# Altium PCB ScreenBoard.PcbDoc
Units mil, origin at the board's own origin, x right, y up, seen from the top; angles counter-clockwise.
Board outline 3470 x 2820 mil, 2 copper layers (Top Layer, Bottom Layer); 7 components, 24 nets, 144 pads, 2611 vias.
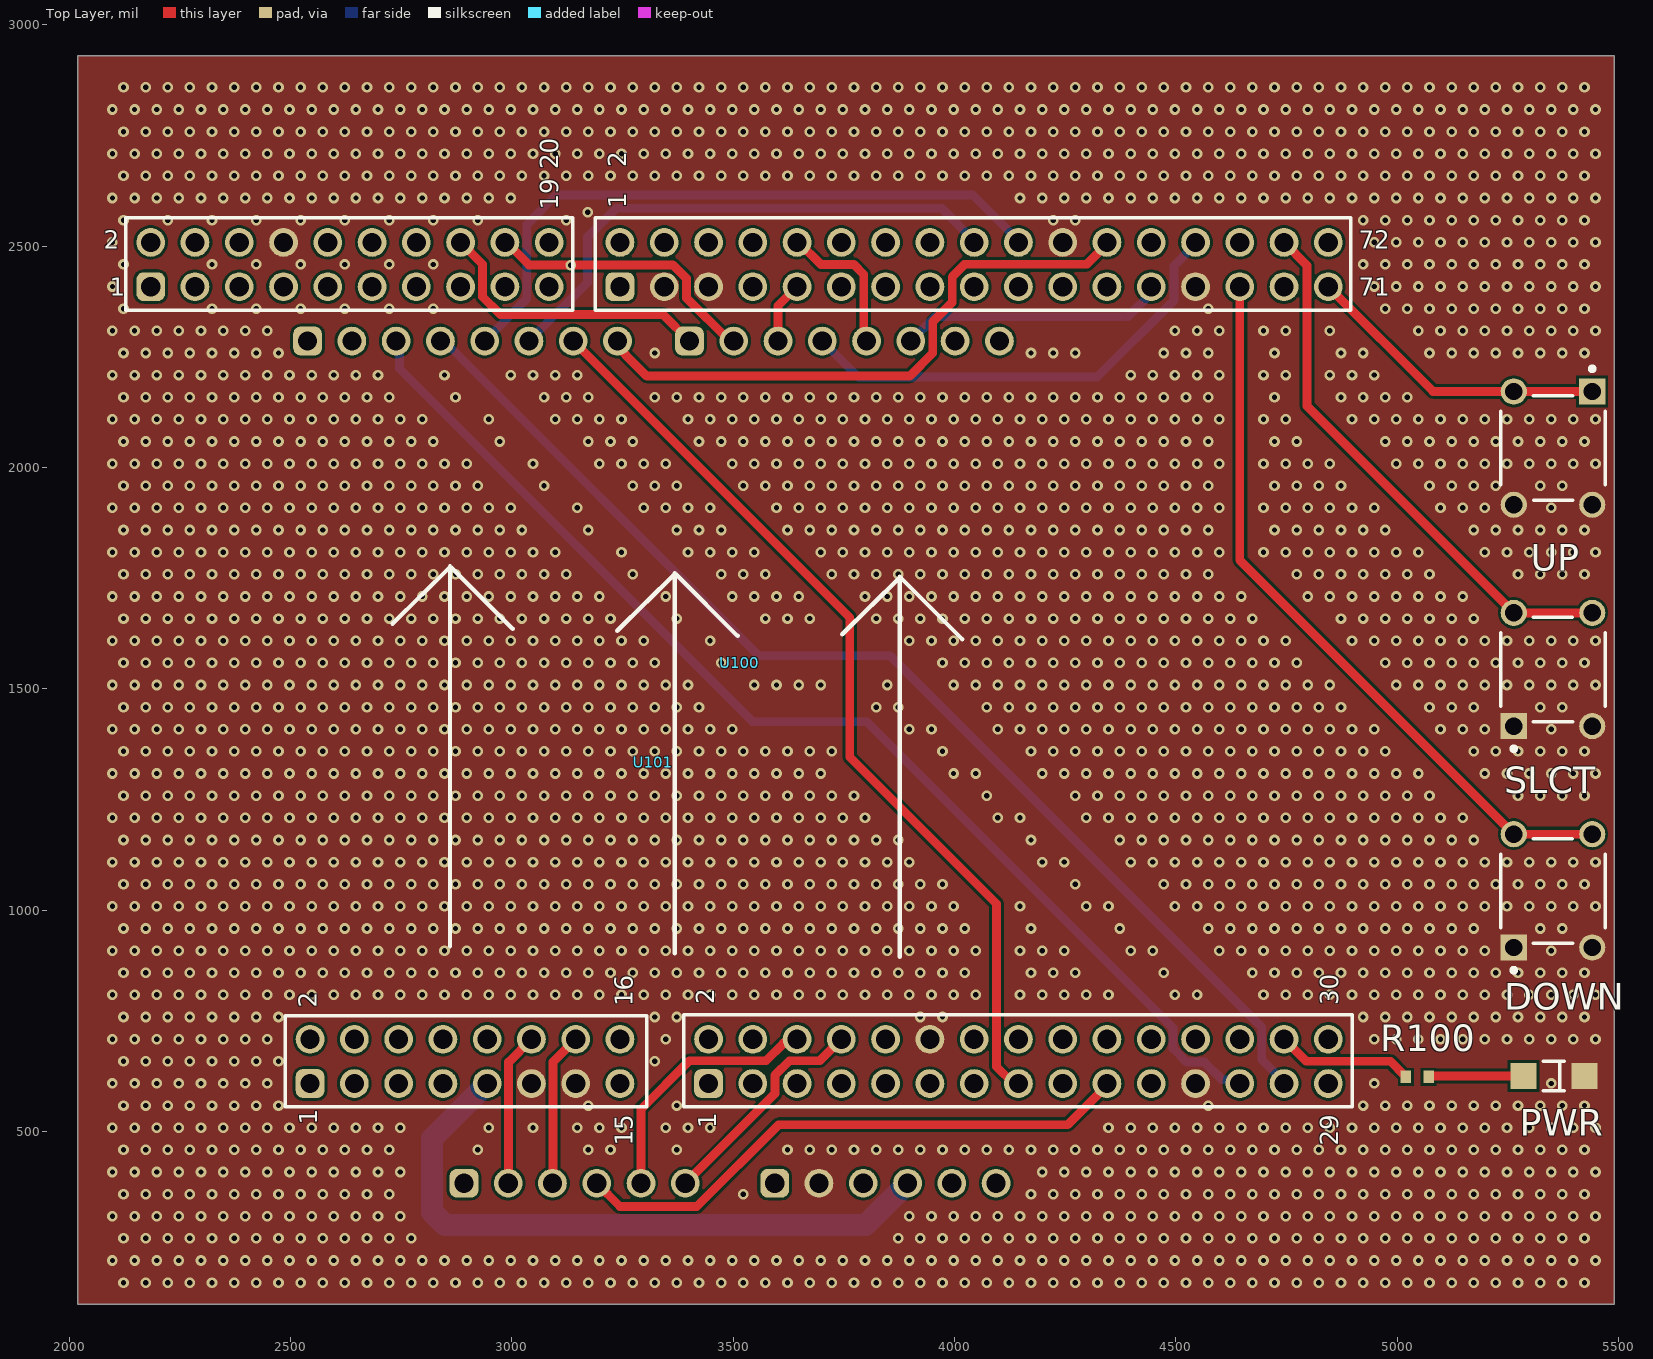
[diagram p0: Top Layer view]
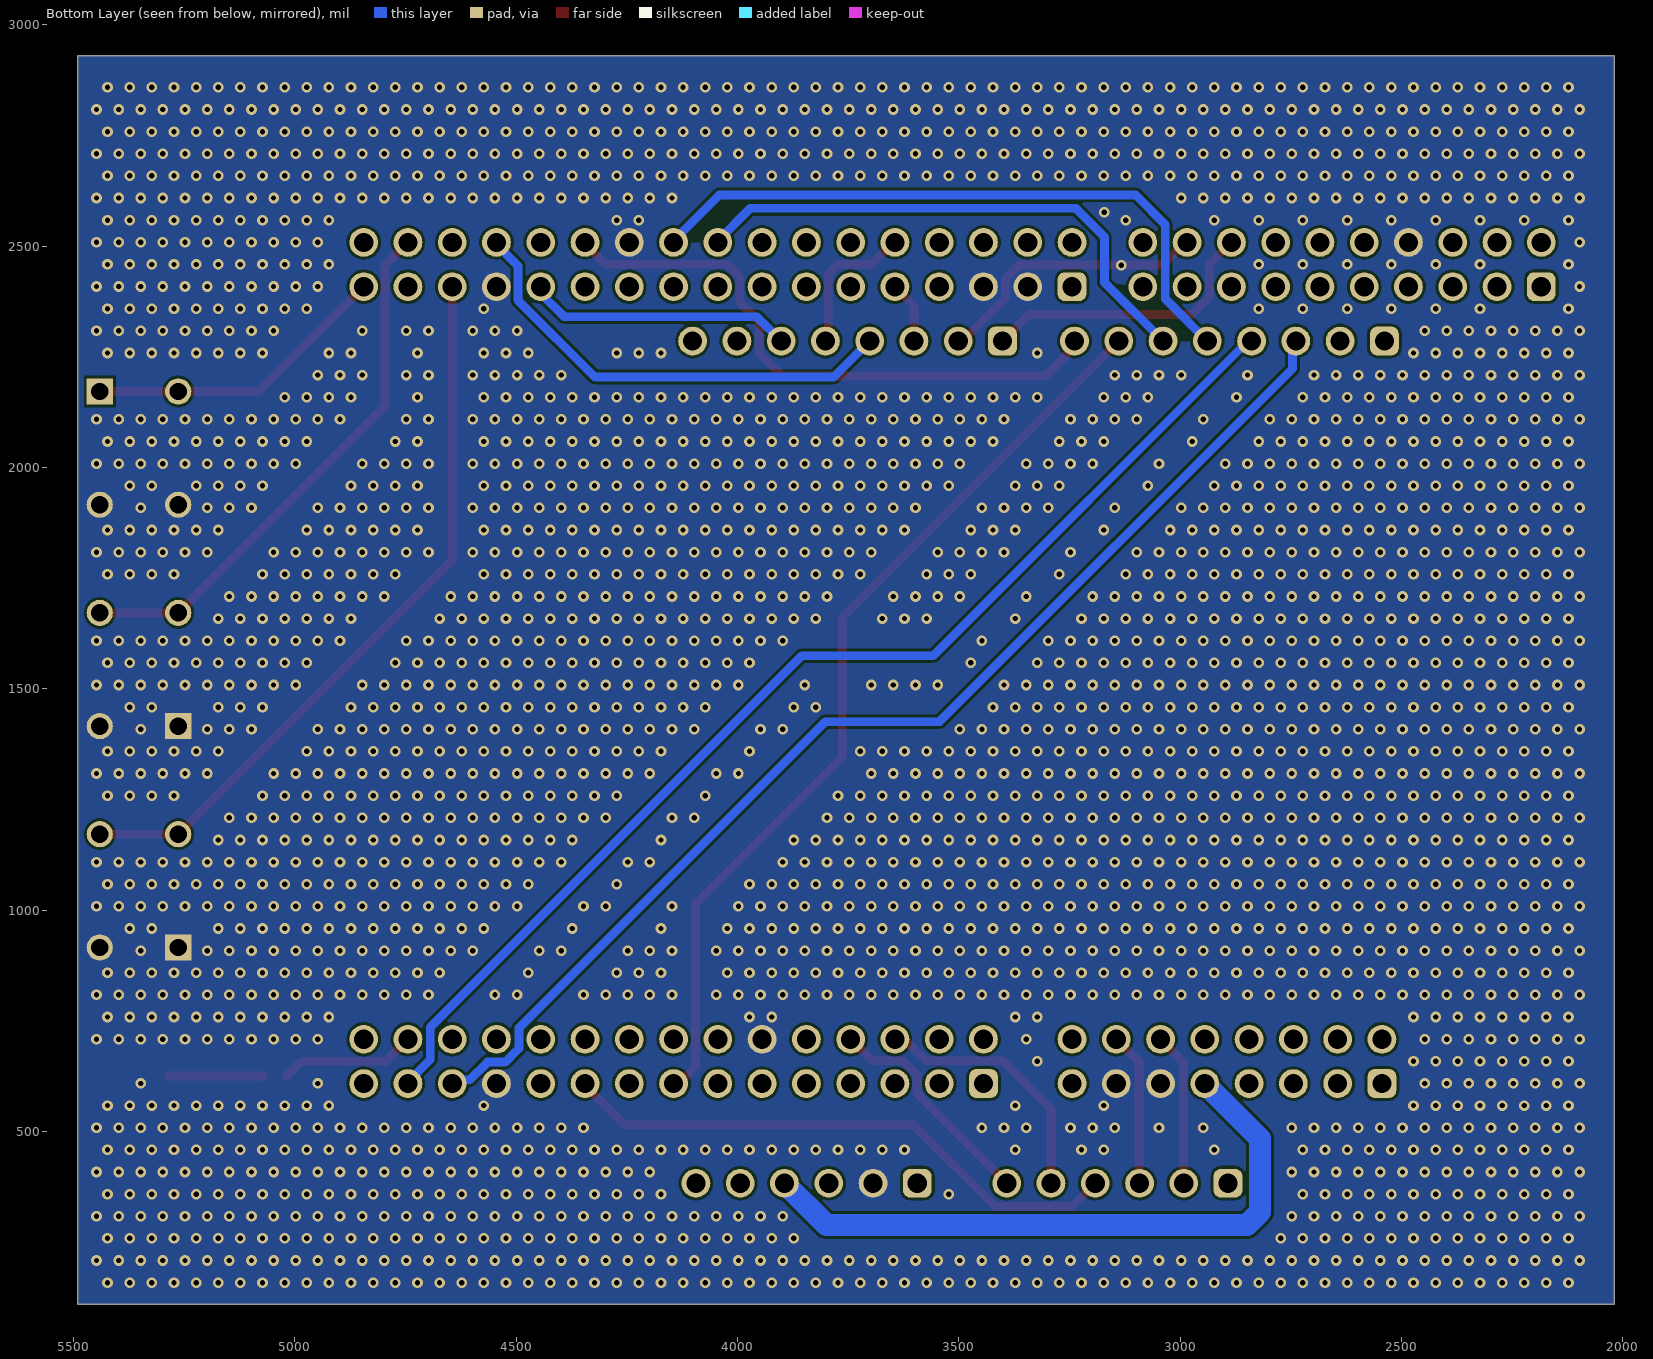
[diagram p1: Bottom Layer view, seen from below]

## Layer stack, top to bottom
Top Solder: solder mask 0.4, Solder Resist, Dk 3.5
Top Layer: signal copper 1.4
Dielectric 1: dielectric 12.6, FR-4, Dk 4.8
Bottom Layer: signal copper 1.4
Bottom Solder: solder mask 0.4, Solder Resist, Dk 3.5

## Board outline
2020,110 5490,110 5490,2930 2020,2930

## Design rules (kind name [scope] priority, off if disabled: settings)
Clearance [All] p1: gap=6 ignorepadtopadclearanceinfootprint=FALSE
HoleSize [All] p1: absolutevalues=TRUE maxlimit=100 minlimit=11.81 maxpercent=80.000 minpercent=20.000
MinimumAnnularRing [All] p1: minimumring=6
MinimumSolderMaskSliver [All] p1: minsoldermaskwidth=6
PolygonConnect [All] p1: connectstyle=Direct reliefconductorwidth=10 reliefentries=4 polygonreliefangle="90 Angle" airgapwidth=10
RoutingVias [All] p1: holewidth=11.81 width=50 viastyle="Through Hole" minholewidth=11.81 minwidth=10 maxholewidth=28 maxwidth=50
SolderMaskExpansion [All] p1: expansion=4 istentingtop=FALSE
Width [All] p1: maxlimit=50 minlimit=6 preferedwidth=10 minimp=50.000000 maximp=50.000000 favimp=50.000000
28 further rules are at their usual default settings.

## Components (designator, comment, footprint, x,y, rotation, side; value= is the part's Value field where it differs from the comment)
DOWN "1825910-6" TECO-1825910-6_V 5352,1044 r90 top locked (schematic designator SW102)
PWR "HSMG-C150" FP-HSMG-C150-MFG 5354,626 r180 top (schematic designator D100)
R100 "0402" 0402_FOOTPRINT 5071,624 r180 top
SLCT "1825910-6" TECO-1825910-6_V 5352,2044 r270 top locked (schematic designator SW100)
U100 "NUCLEO-H755ZL_Zio" H7/H5_NUCLEO_ZIO 1344.48,350.47 r90 top locked
U101 "3'5_LCD_ARDUINO" 3'5_LCD_ARDUINO 2892,383.61 r90 top
UP "1825910-6" TECO-1825910-6_V 5352,1544 r90 top locked (schematic designator SW101)

## Footprints (in the part's own frame and the unit in brackets; to place one, negate y for a bottom-side part, rotate by r counter-clockwise, add the part's x,y. Pads: shape width x height; smd on the part's side, far side on the other; paste and mask are expansions set on the pad)
3'5_LCD_ARDUINO [mm]
  rrect50% 1.65x1.65 hole 1.1: 1(0,0) 7(0,-17.83) 13(48.32,8.97) 21(48.32,-12.94)
  round 1.65 hole 1.1: 2(0,-2.54) 3(0,-5.08) 4(0,-7.62) 5(0,-10.16) 6(0,-12.7) 8(0,-20.37) 9(0,-22.91) 10(0,-25.45) 11(0,-27.99) 12(0,-30.53) 14(48.32,6.43) 15(48.32,3.89) 16(48.32,1.35) 17(48.32,-1.19) 18(48.32,-3.73) 19(48.32,-6.27) 20(48.32,-8.81) 22(48.32,-15.48) 23(48.32,-18.02) 24(48.32,-20.56) 25(48.32,-23.1) 26(48.32,-25.64) 27(48.32,-28.18) 28(48.32,-30.72)
  silkscreen extent 13,-28.6 35.4,4.1
0402_FOOTPRINT [mm]
  rect 0.6x0.7 smd: 1(0,0) 2(1.3,0)
FP-HSMG-C150-MFG [mm]
  rect 1.5x1.5 smd paste+0 mask+0: 1(-1.75,0) 2(1.75,0)
  silkscreen extent -0.6,-0.85 0.6,0.85, body extent -2.6,-0.95 2.6,0.95, height 0.25
H7/H5_NUCLEO_ZIO [mm]
  rrect50% 1.65x1.65 hole 1.1: 1(6.56,-30.48) 17(6.56,-53.34) 47(52.28,-21.336) 67(52.28,-48.26)
  round 1.65 hole 1.1: 2(9.1,-30.48) 3(6.56,-33.02) 4(9.1,-33.02) 5(6.56,-35.56) 6(9.1,-35.56) 7(6.56,-38.1) 8(9.1,-38.1) 9(6.56,-40.64) 10(9.1,-40.64) 11(6.56,-43.18) 12(9.1,-43.18) 13(6.56,-45.72) 14(9.1,-45.72) 15(6.56,-48.26) 16(9.1,-48.26) 18(9.1,-53.34) 19(6.56,-55.88) 20(9.1,-55.88) 21(6.56,-58.42) 22(9.1,-58.42) 23(6.56,-60.96) 24(9.1,-60.96) 25(6.56,-63.5) 26(9.1,-63.5) 27(6.56,-66.04) 28(9.1,-66.04) 29(6.56,-68.58) 30(9.1,-68.58) 31(6.56,-71.12) 32(9.1,-71.12) 33(6.56,-73.66) 34(9.1,-73.66) 35(6.56,-76.2) 36(9.1,-76.2) 37(6.56,-78.74) 38(9.1,-78.74) 39(6.56,-81.28) 40(9.1,-81.28) 41(6.56,-83.82) 42(9.1,-83.82) 43(6.56,-86.36) 44(9.1,-86.36) 45(6.56,-88.9) 46(9.1,-88.9) 48(54.82,-21.336) 49(52.28,-23.876) 50(54.82,-23.876) 51(52.28,-26.416) 52(54.82,-26.416) 53(52.28,-28.956) 54(54.82,-28.956) 55(52.28,-31.496) 56(54.82,-31.496) 57(52.28,-34.036) 58(54.82,-34.036) 59(52.28,-36.576) 60(54.82,-36.576) 61(52.28,-39.116) 62(54.82,-39.116) 63(52.28,-41.656) 64(54.82,-41.656) 65(52.28,-44.196) 66(54.82,-44.196) 68(54.82,-48.26) 69(52.28,-50.8) 70(54.82,-50.8) 71(52.28,-53.34) 72(54.82,-53.34) 73(52.28,-55.88) 74(54.82,-55.88) 75(52.28,-58.42) 76(54.82,-58.42) 77(52.28,-60.96) 78(54.82,-60.96) 79(52.28,-63.5) 80(54.82,-63.5) 81(52.28,-66.04) 82(54.82,-66.04) 83(52.28,-68.58) 84(54.82,-68.58) 85(52.28,-71.12) 86(54.82,-71.12) 87(52.28,-73.66) 88(54.82,-73.66) 89(52.28,-76.2) 90(54.82,-76.2) 91(52.28,-78.74) 92(54.82,-78.74) 93(52.28,-81.28) 94(54.82,-81.28) 95(52.28,-83.82) 96(54.82,-83.82) 97(52.28,-86.36) 98(54.82,-86.36) 99(52.28,-88.9) 100(54.82,-88.9)
  silkscreen extent 5.21,-90.26 56.22,-19.92
TECO-1825910-6_V [mm] "Switch, 4-Leads, Body 5.99x5.99mm"
  rect 1.5x1.5 hole 0.99: 1(-3.25,2.25)
  round 1.5 hole 0.99: 2(3.25,2.25) 3(-3.25,-2.25) 4(3.25,-2.25)
  silkscreen extent -4.67,-2.99 2.99,3, body extent -3,-2.99 2.99,3, height 5

## Part data
DOWN SLCT UP: library part CMP-1684-00021-1, "Tact Switch, SPST-NO, 0.05 A, -35 to 85 degC, 4-Pin THD, RoHS, Bulk", Actuator Color=Black, Contact Rating @ Voltage=0.05A@24VDC, Dielectric Strength=500VAC, Manufacturer="TE Connectivity", Maximum AC Voltage Rating=N/A, Maximum Contact Resistance=100mOhm, Maximum DC Voltage Rating=24V, Minimum Insulation Resistance=100MOhm, Operating Temperature=-35to85C, Package Description="4-Pin Through Hole Device, Body 5.99 x 5.99 mm, Pitch 6.5 mm", Package Reference=THD, Actuator Length=1.4mm, Actuator Material=PolybutyleneTerephthalate, Actuator Style=RoundButton, Base Material=N/A, Body Orientation=Straight, Bushing Type=Unthreaded, Contact Material=CopperAlloy, Contact Plating=Silver, Datasheet URL=http://www.te.com/commerce/DocumentDelivery/DDEController?Action=showdoc&DocId=Customer+Drawing%7F1825910%7FC9%7Fpdf%7FEnglish%7FENG_CD_1825910_C9.pdf%7F1825910-6, Datasheet Version="Rev. C9", Dimension=5.99x5mm, Electrical Life=100000Cycles, Family=1825910, Function=MomentaryContact, Housing Material=N/A, Illumination=N/R, Manufacturer URL=http://www.te.com, Mechanical Life=100000Cycles, Mounting=ThroughHole, Packaging=N/A, Part No=1825910-6, Pole Throw Configuration=SPST, Product Weight=N/A, RoHS=Yes, Seal Description=N/A, Seal Location=N/A, Switch Configuration=OFF(ON), Terminal Type=PCPins, Thread Size=N/R
PWR: library part CMP-2000-05061-2, "LED GREEN DIFFUSED 1206 SMD", Colour=Green, Forward Current=20mA, Forward Voltage=2.2V, Manufacturer=Broadcom, Max Junction Temp=+95°C, Power Dissipation=65mW, Reverse Voltage=5V, Temperature="-40°C to +85°C", Temperature Range High=+85°C, Temperature Range Low=-40°C, Automotive=No, Category=Diode, ComponentLink2Description=Datasheet, ComponentLink2URL=https://docs.broadcom.com/docs/AV02-0551EN, Device Class L1=Optoelectronics, Device Class L2=LEDs, Device Class L3=unset, Digikey Description="LED GREEN DIFFUSED 1206 SMD", Height=1.2mm, Ipc Land Pattern Name=DIOCP320160X55, Lead Free=Yes, Led Orientation="Top View", Luminous Intensity=15mcd, Manufacturer Part Number=HSMG-C150, Mouser Description="LED Uni-Color Green 570nm 2-Pin Chip LED T/R", Octopart=https://octopart.com/hsmg-c150-broadcom-71131304, Package=HSMG-C150, Peak Emmision Wavelength=570nm, RoHS=TRUE, Viewing Angle=170°, Wavelength=572nm
R100: library part Resistor_0402, "0402 resistor"

## Via types
v1: diameter 24, hole 12, Top Layer to Bottom Layer, 2611 vias

## Nets (pads, with @x,y where several pads share a name; then routed paths per layer and width w, separated by ;. In a path a pad name is that pad's centre, name@x,y a point inside that pad or via, vN(x,y) a via of type N, cw(c..) or ccw(c..) an arc to the next point about the centre after c; other vN are vias at no path point)
5V: U100.9 U101.10 | length 1467.3
  Bottom Layer w50: U100.9 2820,484.26 2820,318.29 2849.29,289 3799.36,289 U101.10
BTN_1: SLCT.1 SLCT.3 U100.99 | length 694.2
  Top Layer w20: U100.99 5081.27,2171.95 SLCT.3 SLCT.1
BTN_2: U100.98 UP.2 UP.4 | length 1228.9
  Top Layer w20: U100.98 4796,2457.22 4796,2139.37 UP.2 UP.4
BTN_3: DOWN.2 DOWN.4 U100.95 | length 1670.3
  Top Layer w20: U100.95 4644.48,1790.89 DOWN.2 DOWN.4
CS: U100.14 U101.3 | length 346.9
  Top Layer w20: U101.3 3092.96,384.57 3092.96,657.22 U100.14
D0: U100.62 U101.21 | length 652.1
  Top Layer w20: U100.62 2934,2459.22 2934,2386 2974,2346 3341.42,2346 U101.21
D1: U100.64 U101.22 | length 630.8
  Top Layer w20: U100.64@2988.48,2508.51 3038.99,2458 3363.78,2458 3394.48,2427.3 3394.48,2383.52 3492.03,2285.97 U101.22
D2: U100.41 U101.15 | length 2659.4
  Bottom Layer w20: U101.15 2746.12,2278.7 2746.12,2223.88 3544,1426 3802,1426 4494,734 4494,688 4524.78,657.22 4564.56,657.22 4604.58,617.2 4636.02,617.2 U100.41
D3: U100.43 U101.16 | length 2647.2
  Bottom Layer w20: U101.16 2847.03,2285.97 3558,1575 3855,1575 4694,736 4694,662.99 U100.43@4748.48,608.51
D4: U100.86 U101.17 | length 1489
  Bottom Layer w20: U101.17 3034,2381.12 3034,2549 3100.74,2615.74 4041.25,2615.74 U100.86@4148.48,2508.51
D5: U100.84 U101.18 | length 1226.1
  Bottom Layer w20: U101.18 3170.74,2417.86 3170.74,2520.74 3235.74,2585.74 3971.25,2585.74 U100.84@4048.48,2508.51
D6: U100.31 U101.19 | length 2100.4
  Top Layer w20: U101.19 3763.48,1661.34 3763.48,1346.32 4095,1014.8 4095,647 4133.26,608.74 U100.31
D7: U100.90 U101.20 | length 1350.1
  Top Layer w20: U101.20 3238.85,2273.81 3256.62,2256.04 3256.62,2255.38 3305.26,2206.74 3898.74,2206.74 3951,2259 3951,2329.26 3995,2373.26 3995,2431.26 4023.01,2459.27 4299.24,2459.27 U100.90@4348.48,2508.51
GND: DOWN.1 DOWN.3 PWR.1 SLCT.2 SLCT.4 U100.11 U100.13 U100.28 U100.39 U100.54 U100.69 U100.71 U100.88 U100.93 U101.8 UP.1 UP.3
  other v1: 2123,159 2173,159 2223,159 2273,159 2323,159 2373,159 2423,159 2473,159 2523,159 2573,159 2623,159 2673,159 2723,159 2773,159 2823,159 2873,159 2923,159 2973,159 3023,159 3073,159 3123,159 3173,159 3223,159 3273,159 3323,159 3373,159 3423,159 3473,159 3523,159 3573,159 3623,159 3673,159 3723,159 3773,159 3823,159 3873,159 3923,159 3973,159 4023,159 4073,159 4123,159 4173,159 4223,159 4273,159 4323,159 4373,159 4423,159 4473,159 4523,159 4573,159 4623,159 4673,159 4723,159 4773,159 4823,159 4873,159 4923,159 4973,159 5023,159 5073,159 5123,159 5173,159 5223,159 5273,159 5323,159 5373,159 5423,159 2098,209 2148,209 2198,209 2248,209 2298,209 2348,209 2398,209 2448,209 2498,209 2548,209 2598,209 2648,209 2698,209 2748,209 2798,209 2848,209 2898,209 2948,209 2998,209 3048,209 3098,209 3148,209 3198,209 3248,209 3298,209 3348,209 3398,209 3448,209 3498,209 3548,209 3598,209 3648,209 3698,209 3748,209 3798,209 3848,209 3898,209 3948,209 3998,209 4048,209 4098,209 4148,209 4198,209 4248,209 4298,209 4348,209 4398,209 4448,209 4498,209 4548,209 4598,209 4648,209 4698,209 4748,209 4798,209 4848,209 4898,209 4948,209 4998,209 5048,209 5098,209 5148,209 5198,209 5248,209 5298,209 5348,209 5398,209 5448,209 2123,259 2173,259 2223,259 2273,259 2323,259 2373,259 2423,259 2473,259 2523,259 2573,259 2623,259 2673,259 2723,259 2773,259 3873,259 3923,259 3973,259 4023,259 4073,259 4123,259 4173,259 4223,259 4273,259 4323,259 4373,259 4423,259 4473,259 4523,259 4573,259 4623,259 4673,259 4723,259 4773,259 4823,259 4873,259 4923,259 4973,259 5023,259 5073,259 5123,259 5173,259 5223,259 5273,259 5323,259 5373,259 5423,259 2098,309 2148,309 2198,309 2248,309 2298,309 2348,309 2398,309 2448,309 2498,309 2548,309 2598,309 2648,309 2698,309 2748,309 3898,309 3948,309 3998,309 4048,309 4098,309 4148,309 4198,309 4248,309 4298,309 4348,309 4398,309 4448,309 4498,309 4548,309 4598,309 4648,309 4698,309 4748,309 4798,309 4848,309 4898,309 4948,309 4998,309 5048,309 5098,309 5148,309 5198,309 5248,309 5298,309 5348,309 5398,309 5448,309 2123,359 2173,359 2223,359 2273,359 2323,359 2373,359 2423,359 2473,359 2523,359 2573,359 2623,359 2673,359 2723,359 3523,359 4173,359 4223,359 4273,359 4323,359 4373,359 4423,359 4473,359 4523,359 4573,359 4623,359 4673,359 4723,359 4773,359 4823,359 4873,359 4923,359 4973,359 5023,359 5073,359 5123,359 5173,359 5223,359 5273,359 5323,359 5373,359 5423,359 2098,409 2148,409 2198,409 2248,409 2298,409 2348,409 2398,409 2448,409 2498,409 2548,409 2598,409 2648,409 2698,409 2748,409 4198,409 4248,409 4298,409 4348,409 4398,409 4448,409 4498,409 4548,409 4598,409 4648,409 4698,409 4748,409 4798,409 4848,409 4898,409 4948,409 4998,409 5048,409 5098,409 5148,409 5198,409 5248,409 5298,409 5348,409 5398,409 5448,409 2123,459 2173,459 2223,459 2273,459 2323,459 2373,459 2423,459 2473,459 2523,459 2573,459 2623,459 2673,459 2723,459 2923,459 3173,459 3223,459 3373,459 3623,459 3673,459 3723,459 3773,459 3823,459 3873,459 3923,459 3973,459 4023,459 4073,459 4123,459 4173,459 4223,459 4273,459 4323,459 4373,459 4423,459 4473,459 4523,459 4573,459 4623,459 4673,459 4723,459 4773,459 4823,459 4873,459 4923,459 4973,459 5023,459 5073,459 5123,459 5173,459 5223,459 5273,459 5323,459 5373,459 5423,459 2098,509 2148,509 2198,509 2248,509 2298,509 2348,509 2398,509 2448,509 2498,509 2548,509 2598,509 2648,509 2698,509 2748,509 2948,509 3048,509 3148,509 3198,509 3248,509 3348,509 3398,509 3448,509 4348,509 4398,509 4448,509 4498,509 4548,509 4598,509 4648,509 4698,509 4748,509 4798,509 4848,509 4898,509 4948,509 4998,509 5048,509 5098,509 5148,509 5198,509 5248,509 5298,509 5348,509 5398,509 5448,509 2123,559 2173,559 2223,559 2273,559 2323,559 2373,559 2423,559 2473,559 3173,559 3373,559 4573,559 4923,559 4973,559 5023,559 5073,559 5123,559 5173,559 5223,559 5273,559 5323,559 5373,559 5423,559 2098,609 2148,609 2198,609 2248,609 2298,609 2348,609 2398,609 2448,609 4948,609 5348,609 2123,659 2173,659 2223,659 2273,659 2323,659 2373,659 2423,659 2473,659 3323,659 2098,709 2148,709 2198,709 2248,709 2298,709 2348,709 2398,709 2448,709 3348,709 4948,709 4998,709 5048,709 5098,709 5148,709 5198,709 5248,709 5298,709 5348,709 5398,709 5448,709 2123,759 2173,759 2223,759 2273,759 2323,759 2373,759 2423,759 2473,759 3323,759 3373,759 3923,759 3973,759 4923,759 4973,759 5023,759 5073,759 5123,759 5173,759 5223,759 5273,759 5323,759 5373,759 5423,759 2098,809 2148,809 2198,809 2248,809 2298,809 2348,809 2398,809 2448,809 2498,809 2548,809 2598,809 2648,809 2698,809 2748,809 2798,809 2848,809 2898,809 2948,809 2998,809 3048,809 3098,809 3148,809 3198,809 3248,809 3298,809 3348,809 3398,809 3448,809 3498,809 3548,809 3598,809 3648,809 3698,809 3748,809 3798,809 3848,809 3898,809 3948,809 3998,809 4048,809 4148,809 4198,809 4248,809 4298,809 4348,809 4498,809 4548,809 4698,809 4748,809 4798,809 4848,809 4898,809 4948,809 4998,809 5048,809 5098,809 5148,809 5198,809 5248,809 5298,809 5348,809 5398,809 5448,809 2123,859 2173,859 2223,859 2273,859 2323,859 2373,859 2423,859 2473,859 2523,859 2573,859 2623,859 2673,859 2723,859 2773,859 2823,859 2873,859 2923,859 2973,859 3023,859 3073,859 3123,859 3173,859 3223,859 3273,859 3323,859 3373,859 3423,859 3473,859 3523,859 3573,859 3623,859 3673,859 3723,859 3773,859 3823,859 3873,859 3923,859 3973,859 4023,859 4173,859 4223,859 4273,859 4473,859 4673,859 4723,859 4773,859 4823,859 4873,859 4923,859 4973,859 5023,859 5073,859 5123,859 5173,859 5223,859 5273,859 5323,859 5373,859 5423,859 2098,909 2148,909 2198,909 2248,909 2298,909 2348,909 2398,909 2448,909 2498,909 2548,909 2598,909 2648,909 2698,909 2748,909 2798,909 2848,909 2898,909 2948,909 2998,909 3048,909 3098,909 3148,909 3198,909 3248,909 3298,909 3348,909 3398,909 3448,909 3498,909 3548,909 3598,909 3648,909 3698,909 3748,909 3798,909 3848,909 3898,909 3948,909 3998,909 4048,909 4148,909 4198,909 4248,909 4398,909 4448,909 4598,909 4648,909 4698,909 4748,909 4798,909 4848,909 4898,909 4948,909 4998,909 5048,909 5098,909 5148,909 5198,909 5348,909 2123,959 2173,959 2223,959 2273,959 2323,959 2373,959 2423,959 2473,959 2523,959 2573,959 2623,959 2673,959 2723,959 2773,959 2823,959 2873,959 2923,959 2973,959 3023,959 3073,959 3123,959 3173,959 3223,959 3273,959 3323,959 3373,959 3423,959 3473,959 3523,959 3573,959 3623,959 3673,959 3723,959 3773,959 3823,959 3873,959 3923,959 3973,959 4023,959 4173,959 4373,959 4573,959 4623,959 4673,959 4723,959 4773,959 4823,959 4873,959 4923,959 4973,959 5023,959 5073,959 5123,959 5173,959 5323,959 5373,959 2098,1009 2148,1009 2198,1009 2248,1009 2298,1009 2348,1009 2398,1009 2448,1009 2498,1009 2548,1009 2598,1009 2648,1009 2698,1009 2748,1009 2798,1009 2848,1009 2898,1009 2948,1009 2998,1009 3048,1009 3098,1009 3148,1009 3198,1009 3248,1009 3298,1009 3348,1009 3398,1009 3448,1009 3498,1009 3548,1009 3598,1009 3648,1009 3698,1009 3748,1009 3798,1009 3848,1009 3898,1009 3948,1009 3998,1009 4148,1009 4298,1009 4348,1009 4498,1009 4548,1009 4598,1009 4648,1009 4698,1009 4748,1009 4798,1009 4848,1009 4898,1009 4948,1009 4998,1009 5048,1009 5098,1009 5148,1009 5198,1009 5248,1009 5298,1009 5348,1009 5398,1009 5448,1009 2123,1059 2173,1059 2223,1059 2273,1059 2323,1059 2373,1059 2423,1059 2473,1059 2523,1059 2573,1059 2623,1059 2673,1059 2723,1059 2773,1059 2823,1059 2873,1059 2923,1059 2973,1059 3023,1059 3073,1059 3123,1059 3173,1059 3223,1059 3273,1059 3323,1059 3373,1059 3423,1059 3473,1059 3523,1059 3573,1059 3623,1059 3673,1059 3723,1059 3773,1059 3823,1059 3873,1059 3923,1059 3973,1059 4273,1059 4473,1059 4523,1059 4573,1059 4623,1059 4673,1059 4723,1059 4773,1059 4823,1059 4873,1059 4923,1059 4973,1059 5023,1059 5073,1059 5123,1059 5173,1059 5223,1059 5273,1059 5323,1059 5373,1059 5423,1059 2098,1109 2148,1109 2198,1109 2248,1109 2298,1109 2348,1109 2398,1109 2448,1109 2498,1109 2548,1109 2598,1109 2648,1109 2698,1109 2748,1109 2798,1109 2848,1109 2898,1109 2948,1109 2998,1109 3048,1109 3098,1109 3148,1109 3198,1109 3248,1109 3298,1109 3348,1109 3398,1109 3448,1109 3498,1109 3548,1109 3598,1109 3648,1109 3698,1109 3748,1109 3798,1109 3848,1109 3898,1109 4198,1109 4248,1109 4398,1109 4448,1109 4498,1109 4548,1109 4598,1109 4648,1109 4698,1109 4748,1109 4798,1109 4848,1109 4898,1109 4948,1109 4998,1109 5048,1109 5098,1109 5148,1109 5198,1109 5248,1109 5298,1109 5348,1109 5398,1109 5448,1109 2123,1159 2173,1159 2223,1159 2273,1159 2323,1159 2373,1159 2423,1159 2473,1159 2523,1159 2573,1159 2623,1159 2673,1159 2723,1159 2773,1159 2823,1159 2873,1159 2923,1159 2973,1159 3023,1159 3073,1159 3123,1159 3173,1159 3223,1159 3273,1159 3323,1159 3373,1159 3423,1159 3473,1159 3523,1159 3573,1159 3623,1159 3673,1159 3723,1159 3773,1159 3823,1159 3873,1159 4173,1159 4373,1159 4423,1159 4473,1159 4523,1159 4573,1159 4623,1159 4673,1159 4723,1159 4773,1159 4823,1159 4873,1159 4923,1159 4973,1159 5023,1159 5073,1159 5123,1159 5173,1159 2098,1209 2148,1209 2198,1209 2248,1209 2298,1209 2348,1209 2398,1209 2448,1209 2498,1209 2548,1209 2598,1209 2648,1209 2698,1209 2748,1209 2798,1209 2848,1209 2898,1209 2948,1209 2998,1209 3048,1209 3098,1209 3148,1209 3198,1209 3248,1209 3298,1209 3348,1209 3398,1209 3448,1209 3498,1209 3548,1209 3598,1209 3648,1209 3698,1209 3748,1209 3798,1209 4098,1209 4148,1209 4298,1209 4348,1209 4398,1209 4448,1209 4498,1209 4548,1209 4598,1209 4648,1209 4698,1209 4748,1209 4798,1209 4848,1209 4898,1209 4948,1209 4998,1209 5048,1209 5098,1209 5148,1209 2123,1259 2173,1259 2223,1259 2273,1259 2323,1259 2373,1259 2423,1259 2473,1259 2523,1259 2573,1259 2623,1259 2673,1259 2723,1259 2773,1259 2823,1259 2873,1259 2923,1259 2973,1259 3023,1259 3073,1259 3123,1259 3173,1259 3223,1259 3273,1259 3323,1259 3373,1259 3423,1259 3473,1259 3523,1259 3573,1259 3623,1259 3673,1259 3723,1259 3773,1259 4073,1259 4273,1259 4323,1259 4373,1259 4423,1259 4473,1259 4523,1259 4573,1259 4623,1259 4673,1259 4723,1259 4773,1259 4823,1259 4873,1259 4923,1259 4973,1259 5023,1259 5073,1259 5273,1259 5323,1259 5373,1259 5423,1259 2098,1309 2148,1309 2198,1309 2248,1309 2298,1309 2348,1309 2398,1309 2448,1309 2498,1309 2548,1309 2598,1309 2648,1309 2698,1309 2748,1309 2798,1309 2848,1309 2898,1309 2948,1309 2998,1309 3048,1309 3098,1309 3148,1309 3198,1309 3248,1309 3298,1309 3348,1309 3398,1309 3448,1309 3498,1309 3548,1309 3598,1309 3648,1309 3698,1309 3998,1309 4048,1309 4198,1309 4248,1309 4298,1309 4348,1309 4398,1309 4448,1309 4498,1309 4548,1309 4598,1309 4648,1309 4698,1309 4748,1309 4798,1309 4848,1309 4898,1309 4948,1309 4998,1309 5048,1309 5198,1309 5248,1309 5298,1309 5348,1309 5398,1309 5448,1309 2123,1359 2173,1359 2223,1359 2273,1359 2323,1359 2373,1359 2423,1359 2473,1359 2523,1359 2573,1359 2623,1359 2673,1359 2723,1359 2773,1359 2823,1359 2873,1359 2923,1359 2973,1359 3023,1359 3073,1359 3123,1359 3173,1359 3223,1359 3273,1359 3323,1359 3373,1359 3423,1359 3473,1359 3523,1359 3573,1359 3623,1359 3673,1359 3723,1359 3973,1359 4173,1359 4223,1359 4273,1359 4323,1359 4373,1359 4423,1359 4473,1359 4523,1359 4573,1359 4623,1359 4673,1359 4723,1359 4773,1359 4823,1359 4873,1359 4923,1359 4973,1359 5173,1359 5223,1359 5273,1359 5323,1359 5373,1359 5423,1359 2098,1409 2148,1409 2198,1409 2248,1409 2298,1409 2348,1409 2398,1409 2448,1409 2498,1409 2548,1409 2598,1409 2648,1409 2698,1409 2748,1409 2798,1409 2848,1409 2898,1409 2948,1409 2998,1409 3048,1409 3098,1409 3148,1409 3198,1409 3248,1409 3298,1409 3348,1409 3398,1409 3448,1409 3498,1409 3898,1409 3948,1409 4098,1409 4148,1409 4198,1409 4248,1409 4298,1409 4348,1409 4398,1409 4448,1409 4498,1409 4548,1409 4598,1409 4648,1409 4698,1409 4748,1409 4798,1409 4848,1409 4898,1409 4948,1409 5098,1409 5148,1409 5198,1409 5348,1409 2123,1459 2173,1459 2223,1459 2273,1459 2323,1459 2373,1459 2423,1459 2473,1459 2523,1459 2573,1459 2623,1459 2673,1459 2723,1459 2773,1459 2823,1459 2873,1459 2923,1459 2973,1459 3023,1459 3073,1459 3123,1459 3173,1459 3223,1459 3273,1459 3323,1459 3373,1459 3423,1459 3823,1459 3873,1459 4073,1459 4123,1459 4173,1459 4223,1459 4273,1459 4323,1459 4373,1459 4423,1459 4473,1459 4523,1459 4573,1459 4623,1459 4673,1459 4723,1459 4773,1459 4823,1459 4873,1459 5073,1459 5123,1459 5173,1459 5323,1459 5373,1459 2098,1509 2148,1509 2198,1509 2248,1509 2298,1509 2348,1509 2398,1509 2448,1509 2498,1509 2548,1509 2598,1509 2648,1509 2698,1509 2748,1509 2798,1509 2848,1509 2898,1509 2948,1509 2998,1509 3048,1509 3098,1509 3148,1509 3198,1509 3248,1509 3298,1509 3348,1509 3398,1509 3548,1509 3598,1509 3648,1509 3698,1509 3848,1509 3998,1509 4048,1509 4098,1509 4148,1509 4198,1509 4248,1509 4298,1509 4348,1509 4398,1509 4448,1509 4498,1509 4548,1509 4598,1509 4648,1509 4698,1509 4748,1509 4798,1509 4848,1509 4998,1509 5048,1509 5098,1509 5148,1509 5198,1509 5248,1509 5298,1509 5348,1509 5398,1509 5448,1509 2123,1559 2173,1559 2223,1559 2273,1559 2323,1559 2373,1559 2423,1559 2473,1559 2523,1559 2573,1559 2623,1559 2673,1559 2723,1559 2773,1559 2823,1559 2873,1559 2923,1559 2973,1559 3023,1559 3073,1559 3123,1559 3173,1559 3223,1559 3273,1559 3323,1559 3473,1559 3973,1559 4023,1559 4073,1559 4123,1559 4173,1559 4223,1559 4273,1559 4323,1559 4373,1559 4423,1559 4473,1559 4523,1559 4573,1559 4623,1559 4673,1559 4723,1559 4773,1559 4973,1559 5023,1559 5073,1559 5123,1559 5173,1559 5223,1559 5273,1559 5323,1559 5373,1559 5423,1559 2098,1609 2148,1609 2198,1609 2248,1609 2298,1609 2348,1609 2398,1609 2448,1609 2498,1609 2548,1609 2598,1609 2648,1609 2698,1609 2748,1609 2798,1609 2848,1609 2898,1609 2948,1609 2998,1609 3048,1609 3098,1609 3148,1609 3198,1609 3248,1609 3298,1609 3448,1609 3898,1609 3948,1609 3998,1609 4048,1609 4098,1609 4148,1609 4198,1609 4248,1609 4298,1609 4348,1609 4398,1609 4448,1609 4498,1609 4548,1609 4598,1609 4648,1609 4698,1609 4748,1609 4898,1609 4948,1609 4998,1609 5048,1609 5098,1609 5148,1609 5198,1609 5248,1609 5298,1609 5348,1609 5398,1609 5448,1609 2123,1659 2173,1659 2223,1659 2273,1659 2323,1659 2373,1659 2423,1659 2473,1659 2523,1659 2573,1659 2623,1659 2673,1659 2723,1659 2773,1659 2823,1659 2873,1659 2923,1659 2973,1659 3023,1659 3073,1659 3123,1659 3173,1659 3223,1659 3373,1659 3573,1659 3623,1659 3673,1659 3823,1659 3873,1659 3923,1659 3973,1659 4023,1659 4073,1659 4123,1659 4173,1659 4223,1659 4273,1659 4323,1659 4373,1659 4423,1659 4473,1659 4523,1659 4573,1659 4623,1659 4673,1659 4873,1659 4923,1659 4973,1659 5023,1659 5073,1659 5123,1659 5173,1659 2098,1709 2148,1709 2198,1709 2248,1709 2298,1709 2348,1709 2398,1709 2448,1709 2498,1709 2548,1709 2598,1709 2648,1709 2698,1709 2748,1709 2798,1709 2848,1709 2898,1709 2948,1709 2998,1709 3048,1709 3098,1709 3148,1709 3198,1709 3348,1709 3498,1709 3548,1709 3598,1709 3648,1709 3798,1709 3848,1709 3898,1709 3948,1709 3998,1709 4048,1709 4098,1709 4148,1709 4198,1709 4248,1709 4298,1709 4348,1709 4398,1709 4448,1709 4498,1709 4548,1709 4598,1709 4648,1709 4798,1709 4848,1709 4898,1709 4948,1709 4998,1709 5048,1709 5098,1709 5148,1709 2123,1759 2173,1759 2223,1759 2273,1759 2323,1759 2373,1759 2423,1759 2473,1759 2523,1759 2573,1759 2623,1759 2673,1759 2723,1759 2773,1759 2823,1759 2873,1759 2923,1759 2973,1759 3023,1759 3073,1759 3123,1759 3273,1759 3473,1759 3523,1759 3573,1759 3723,1759 3773,1759 3823,1759 3873,1759 3923,1759 3973,1759 4023,1759 4073,1759 4123,1759 4173,1759 4223,1759 4273,1759 4323,1759 4373,1759 4423,1759 4473,1759 4523,1759 4573,1759 4773,1759 4823,1759 4873,1759 4923,1759 4973,1759 5023,1759 5073,1759 5273,1759 5323,1759 5373,1759 5423,1759 2098,1809 2148,1809 2198,1809 2248,1809 2298,1809 2348,1809 2398,1809 2448,1809 2498,1809 2548,1809 2598,1809 2648,1809 2698,1809 2748,1809 2798,1809 2848,1809 2898,1809 2948,1809 2998,1809 3048,1809 3098,1809 3248,1809 3398,1809 3448,1809 3498,1809 3548,1809 3698,1809 3748,1809 3798,1809 3848,1809 3898,1809 3948,1809 3998,1809 4048,1809 4098,1809 4148,1809 4198,1809 4248,1809 4298,1809 4348,1809 4398,1809 4448,1809 4498,1809 4548,1809 4598,1809 4698,1809 4748,1809 4798,1809 4848,1809 4898,1809 4948,1809 4998,1809 5048,1809 5198,1809 5248,1809 5298,1809 5348,1809 5398,1809 5448,1809 2123,1859 2173,1859 2223,1859 2273,1859 2323,1859 2373,1859 2423,1859 2473,1859 2523,1859 2573,1859 2623,1859 2673,1859 2723,1859 2773,1859 2823,1859 2873,1859 2923,1859 2973,1859 3023,1859 3173,1859 3373,1859 3423,1859 3473,1859 3623,1859 3673,1859 3723,1859 3773,1859 3823,1859 3873,1859 3923,1859 3973,1859 4023,1859 4073,1859 4123,1859 4173,1859 4223,1859 4273,1859 4323,1859 4373,1859 4423,1859 4473,1859 4523,1859 4573,1859 4723,1859 4773,1859 4823,1859 4873,1859 4923,1859 4973,1859 5173,1859 5223,1859 5273,1859 5323,1859 5373,1859 5423,1859 2098,1909 2148,1909 2198,1909 2248,1909 2298,1909 2348,1909 2398,1909 2448,1909 2498,1909 2548,1909 2598,1909 2648,1909 2698,1909 2748,1909 2798,1909 2848,1909 2898,1909 2948,1909 2998,1909 3148,1909 3298,1909 3348,1909 3398,1909 3448,1909 3598,1909 3648,1909 3698,1909 3748,1909 3798,1909 3848,1909 3898,1909 3948,1909 3998,1909 4048,1909 4098,1909 4148,1909 4198,1909 4248,1909 4298,1909 4348,1909 4398,1909 4448,1909 4498,1909 4548,1909 4598,1909 4698,1909 4748,1909 4798,1909 4848,1909 4898,1909 4948,1909 5098,1909 5148,1909 5198,1909 5348,1909 2123,1959 2173,1959 2223,1959 2273,1959 2323,1959 2373,1959 2423,1959 2473,1959 2523,1959 2573,1959 2623,1959 2673,1959 2723,1959 2773,1959 2823,1959 2873,1959 2923,1959 3073,1959 3273,1959 3323,1959 3373,1959 3523,1959 3573,1959 3623,1959 3673,1959 3723,1959 3773,1959 3823,1959 3873,1959 3923,1959 3973,1959 4023,1959 4073,1959 4123,1959 4173,1959 4223,1959 4273,1959 4323,1959 4373,1959 4423,1959 4473,1959 4523,1959 4573,1959 4723,1959 4773,1959 4823,1959 4873,1959 5073,1959 5123,1959 5173,1959 5223,1959 5323,1959 5373,1959 2098,2009 2148,2009 2198,2009 2248,2009 2298,2009 2348,2009 2398,2009 2448,2009 2498,2009 2548,2009 2598,2009 2648,2009 2698,2009 2748,2009 2798,2009 2848,2009 2898,2009 3048,2009 3198,2009 3248,2009 3298,2009 3348,2009 3498,2009 3548,2009 3598,2009 3648,2009 3698,2009 3748,2009 3798,2009 3848,2009 3898,2009 3948,2009 3998,2009 4048,2009 4098,2009 4148,2009 4198,2009 4248,2009 4298,2009 4348,2009 4398,2009 4448,2009 4498,2009 4548,2009 4598,2009 4698,2009 4748,2009 4798,2009 4848,2009 4998,2009 5048,2009 5098,2009 5148,2009 5198,2009 5248,2009 5298,2009 5348,2009 5398,2009 5448,2009 2123,2059 2173,2059 2223,2059 2273,2059 2323,2059 2373,2059 2423,2059 2473,2059 2523,2059 2573,2059 2623,2059 2673,2059 2723,2059 2773,2059 2823,2059 2973,2059 3173,2059 3223,2059 3273,2059 3423,2059 3473,2059 3523,2059 3573,2059 3623,2059 3673,2059 3723,2059 3773,2059 3823,2059 3873,2059 3923,2059 3973,2059 4023,2059 4073,2059 4123,2059 4173,2059 4223,2059 4273,2059 4323,2059 4373,2059 4423,2059 4473,2059 4523,2059 4573,2059 4723,2059 4773,2059 4973,2059 5023,2059 5073,2059 5123,2059 5173,2059 5223,2059 5273,2059 5323,2059 5373,2059 5423,2059 2098,2109 2148,2109 2198,2109 2248,2109 2298,2109 2348,2109 2398,2109 2448,2109 2498,2109 2548,2109 2598,2109 2648,2109 2698,2109 2748,2109 2798,2109 2948,2109 3098,2109 3148,2109 3198,2109 3248,2109 3398,2109 3448,2109 3498,2109 3548,2109 3598,2109 3648,2109 3698,2109 3748,2109 3798,2109 3848,2109 3898,2109 3948,2109 3998,2109 4048,2109 4098,2109 4148,2109 4198,2109 4248,2109 4298,2109 4348,2109 4398,2109 4448,2109 4498,2109 4548,2109 4598,2109 4698,2109 4748,2109 4898,2109 4948,2109 4998,2109 5048,2109 5098,2109 5148,2109 5198,2109 5248,2109 5298,2109 5348,2109 5398,2109 5448,2109 2123,2159 2173,2159 2223,2159 2273,2159 2323,2159 2373,2159 2423,2159 2473,2159 2523,2159 2573,2159 2623,2159 2673,2159 2723,2159 2873,2159 3073,2159 3123,2159 3173,2159 3323,2159 3373,2159 3423,2159 3473,2159 3523,2159 3573,2159 3623,2159 3673,2159 3723,2159 3773,2159 3823,2159 3873,2159 3923,2159 3973,2159 4023,2159 4073,2159 4123,2159 4173,2159 4223,2159 4273,2159 4323,2159 4373,2159 4423,2159 4473,2159 4523,2159 4573,2159 4723,2159 4873,2159 4923,2159 4973,2159 5023,2159 2098,2209 2148,2209 2198,2209 2248,2209 2298,2209 2348,2209 2398,2209 2448,2209 2498,2209 2548,2209 2598,2209 2648,2209 2698,2209 2848,2209 2998,2209 3048,2209 3098,2209 3148,2209 4398,2209 4448,2209 4498,2209 4548,2209 4598,2209 4698,2209 4748,2209 4848,2209 4898,2209 4948,2209 2123,2259 2173,2259 2223,2259 2273,2259 2323,2259 2373,2259 2423,2259 2473,2259 3323,2259 4173,2259 4223,2259 4273,2259 4473,2259 4523,2259 4573,2259 4723,2259 4873,2259 4923,2259 5073,2259 5123,2259 5173,2259 5223,2259 5273,2259 5323,2259 5373,2259 5423,2259 2098,2309 2148,2309 2198,2309 2248,2309 2298,2309 2348,2309 2398,2309 2448,2309 4498,2309 4548,2309 4598,2309 4698,2309 4748,2309 4848,2309 5048,2309 5098,2309 5148,2309 5198,2309 5248,2309 5298,2309 5348,2309 5398,2309 5448,2309 2123,2359 2323,2359 2423,2359 2523,2359 2623,2359 2723,2359 2823,2359 4573,2359 4973,2359 5023,2359 5073,2359 5123,2359 5173,2359 5223,2359 5273,2359 5323,2359 5373,2359 5423,2359 2098,2409 4948,2409 4998,2409 5048,2409 5098,2409 5148,2409 5198,2409 5248,2409 5298,2409 5348,2409 5398,2409 5448,2409 3133,2457 2123,2459 2323,2459 2423,2459 2523,2459 2623,2459 2723,2459 2823,2459 4923,2459 4973,2459 5023,2459 5073,2459 5123,2459 5173,2459 5223,2459 5273,2459 5323,2459 5373,2459 5423,2459 2098,2509 4948,2509 4998,2509 5048,2509 5098,2509 5148,2509 5198,2509 5248,2509 5298,2509 5348,2509 5398,2509 5448,2509 2123,2559 2223,2559 2323,2559 2423,2559 2523,2559 2623,2559 2723,2559 2823,2559 2923,2559 3123,2559 4223,2559 4273,2559 4923,2559 4973,2559 5023,2559 5073,2559 5123,2559 5173,2559 5223,2559 5273,2559 5323,2559 5373,2559 5423,2559 3172,2577 2098,2609 2148,2609 2198,2609 2248,2609 2298,2609 2348,2609 2398,2609 2448,2609 2498,2609 2548,2609 2598,2609 2648,2609 2698,2609 2748,2609 2798,2609 2848,2609 2898,2609 2948,2609 2998,2609 4148,2609 4198,2609 4248,2609 4298,2609 4348,2609 4398,2609 4448,2609 4498,2609 4548,2609 4598,2609 4648,2609 4698,2609 4748,2609 4798,2609 4848,2609 4898,2609 4948,2609 4998,2609 5048,2609 5098,2609 5148,2609 5198,2609 5248,2609 5298,2609 5348,2609 5398,2609 5448,2609 2123,2659 2173,2659 2223,2659 2273,2659 2323,2659 2373,2659 2423,2659 2473,2659 2523,2659 2573,2659 2623,2659 2673,2659 2723,2659 2773,2659 2823,2659 2873,2659 2923,2659 2973,2659 3023,2659 3073,2659 3123,2659 3173,2659 3223,2659 3273,2659 3323,2659 3373,2659 3423,2659 3473,2659 3523,2659 3573,2659 3623,2659 3673,2659 3723,2659 3773,2659 3823,2659 3873,2659 3923,2659 3973,2659 4023,2659 4073,2659 4123,2659 4173,2659 4223,2659 4273,2659 4323,2659 4373,2659 4423,2659 4473,2659 4523,2659 4573,2659 4623,2659 4673,2659 4723,2659 4773,2659 4823,2659 4873,2659 4923,2659 4973,2659 5023,2659 5073,2659 5123,2659 5173,2659 5223,2659 5273,2659 5323,2659 5373,2659 5423,2659 2098,2709 2148,2709 2198,2709 2248,2709 2298,2709 2348,2709 2398,2709 2448,2709 2498,2709 2548,2709 2598,2709 2648,2709 2698,2709 2748,2709 2798,2709 2848,2709 2898,2709 2948,2709 2998,2709 3048,2709 3098,2709 3148,2709 3198,2709 3248,2709 3298,2709 3348,2709 3398,2709 3448,2709 3498,2709 3548,2709 3598,2709 3648,2709 3698,2709 3748,2709 3798,2709 3848,2709 3898,2709 3948,2709 3998,2709 4048,2709 4098,2709 4148,2709 4198,2709 4248,2709 4298,2709 4348,2709 4398,2709 4448,2709 4498,2709 4548,2709 4598,2709 4648,2709 4698,2709 4748,2709 4798,2709 4848,2709 4898,2709 4948,2709 4998,2709 5048,2709 5098,2709 5148,2709 5198,2709 5248,2709 5298,2709 5348,2709 5398,2709 5448,2709 2123,2759 2173,2759 2223,2759 2273,2759 2323,2759 2373,2759 2423,2759 2473,2759 2523,2759 2573,2759 2623,2759 2673,2759 2723,2759 2773,2759 2823,2759 2873,2759 2923,2759 2973,2759 3023,2759 3073,2759 3123,2759 3173,2759 3223,2759 3273,2759 3323,2759 3373,2759 3423,2759 3473,2759 3523,2759 3573,2759 3623,2759 3673,2759 3723,2759 3773,2759 3823,2759 3873,2759 3923,2759 3973,2759 4023,2759 4073,2759 4123,2759 4173,2759 4223,2759 4273,2759 4323,2759 4373,2759 4423,2759 4473,2759 4523,2759 4573,2759 4623,2759 4673,2759 4723,2759 4773,2759 4823,2759 4873,2759 4923,2759 4973,2759 5023,2759 5073,2759 5123,2759 5173,2759 5223,2759 5273,2759 5323,2759 5373,2759 5423,2759 2098,2809 2148,2809 2198,2809 2248,2809 2298,2809 2348,2809 2398,2809 2448,2809 2498,2809 2548,2809 2598,2809 2648,2809 2698,2809 2748,2809 2798,2809 2848,2809 2898,2809 2948,2809 2998,2809 3048,2809 3098,2809 3148,2809 3198,2809 3248,2809 3298,2809 3348,2809 3398,2809 3448,2809 3498,2809 3548,2809 3598,2809 3648,2809 3698,2809 3748,2809 3798,2809 3848,2809 3898,2809 3948,2809 3998,2809 4048,2809 4098,2809 4148,2809 4198,2809 4248,2809 4298,2809 4348,2809 4398,2809 4448,2809 4498,2809 4548,2809 4598,2809 4648,2809 4698,2809 4748,2809 4798,2809 4848,2809 4898,2809 4948,2809 4998,2809 5048,2809 5098,2809 5148,2809 5198,2809 5248,2809 5298,2809 5348,2809 5398,2809 5448,2809 2123,2859 2173,2859 2223,2859 2273,2859 2323,2859 2373,2859 2423,2859 2473,2859 2523,2859 2573,2859 2623,2859 2673,2859 2723,2859 2773,2859 2823,2859 2873,2859 2923,2859 2973,2859 3023,2859 3073,2859 3123,2859 3173,2859 3223,2859 3273,2859 3323,2859 3373,2859 3423,2859 3473,2859 3523,2859 3573,2859 3623,2859 3673,2859 3723,2859 3773,2859 3823,2859 3873,2859 3923,2859 3973,2859 4023,2859 4073,2859 4123,2859 4173,2859 4223,2859 4273,2859 4323,2859 4373,2859 4423,2859 4473,2859 4523,2859 4573,2859 4623,2859 4673,2859 4723,2859 4773,2859 4823,2859 4873,2859 4923,2859 4973,2859 5023,2859 5073,2859 5123,2859 5173,2859 5223,2859 5273,2859 5323,2859 5373,2859 5423,2859
NetD100_2: PWR.2 R100.1 | length 215
  Top Layer w20: R100.1 5071,624.19 5072.81,626 PWR.2
RD: U100.24 U101.6 | length 511.3
  Top Layer w20: U101.6 3594.48,586.09 3594.48,627.3 3627.44,660.26 3696,660.26 U100.24
RS: U100.35 U101.4 | length 1293.2
  Top Layer w20: U101.4 3244.61,331 3418,331 3602.74,515.74 4255.71,515.74 U100.35@4348.48,608.51
RST: U100.12 U101.2 | length 346.9
  Top Layer w20: U101.2 2992.96,384.57 2992.96,657.22 U100.12
SCREEN_LED: R100.2 U100.44 | length 311.6
  Top Layer w20: U100.44 4794.22,659 4984.82,659 5016.04,627.78 5018.01,627.78 5019.82,625.97 R100.2
SD_DI: U100.94 U101.24 | length 1052.1
  Bottom Layer w20: U101.24 3782.68,2204.74 4322.48,2204.74 4496,2378.26 4496,2456.03 U100.94@4548.48,2508.51
SD_DO: U100.76 U101.25 | length 329.4
  Top Layer w20: U100.76@3648.48,2508.51 3697.99,2459 3772.22,2459 3795,2436.22 3795,2292.42 U101.25
SD_SCK: U100.91 U101.26 | length 604.2
  Bottom Layer w20: U101.26 3956.22,2340.74 4391.62,2340.74 4448.48,2397.6 U100.91@4448.48,2408.51
SD_SS: U100.75 U101.23 | length 140.6
  Top Layer w20: U101.23 3601.45,2365.71 U100.75
WR: U100.22 U101.5 | length 585.2
  Top Layer w20: U101.5 3292,551 3401.26,660.26 3574.26,660.26 3614.14,700.14 3635.88,700.14 U100.22
pads on no net: U100.1 U100.2 U100.3 U100.4 U100.5 U100.6 U100.7 U100.8 U100.10 U100.15 U100.16 U100.17 U100.18 U100.19 U100.20 U100.21 U100.23 U100.25 U100.26 U100.27 U100.29 U100.30 U100.32 U100.33 U100.34 U100.36 U100.37 U100.38 U100.40 U100.42 U100.45 U100.46 U100.47 U100.48 U100.49 U100.50 U100.51 U100.52 U100.53 U100.55 U100.56 U100.57 U100.58 U100.59 U100.60 U100.61 U100.63 U100.65 U100.66 U100.67 U100.68 U100.70 U100.72 U100.73 U100.74 U100.77 U100.78 U100.79 U100.80 U100.81 U100.82 U100.83 U100.85 U100.87 U100.89 U100.92 U100.96 U100.97 U100.100 U101.1 U101.7 U101.9 U101.11 U101.12 U101.13 U101.14 U101.27 U101.28

## Polygon pours and split planes (outlines as drawn)
GND on Top Layer "NONET_L-01_P-001" (solid, remove dead copper, pour order 0): 2020,110 5490,110 5490,2930 2020,2930
GND on Bottom Layer "NONET_L-01_P-001" (solid, remove dead copper, pour order 2): 2020,110 5490,110 5490,2930 2020,2930

## Other copper
Bottom Layer:
  pour cut-out: 3084.48,2408.74 3056.86,2381.12 3034,2381.12 2938.85,2285.97 3038.85,2285.97 3170.74,2417.86
  pour cut-out: 4044.48,2508.74 4144.48,2508.74 4144.48,2533.82 4046.3,2632 3931,2632 3931,2622.22

## Text inside footprints (layer, text, board x,y; h text height)
U100: Top Overlay "2" at 2078,2494 h40; Top Overlay "1" at 2092,2388 h40; Top Overlay "20" at 3105,2674 h40 r90; Top Overlay "19" at 3105,2582 h40 r90; Top Overlay "2" at 3457.87,787.48 h40 r90; Top Overlay "1" at 3461.8,507.95 h40 r90; Top Overlay "30" at 4867,786 h40 r90; Top Overlay "29" at 4867.32,468.58 h40 r90; Top Overlay "15" at 3272.83,468.58 h40 r90; Top Overlay "16" at 3272.83,783.54 h40 r90; Top Overlay "1" at 2560.23,515.83 h40 r90; Top Overlay "2" at 2560,780 h40 r90; Top Overlay "2" at 3259,2679 h40 r90; Top Overlay "1" at 3259,2586 h40 r90; Top Overlay "72" at 4913,2494 h40; Top Overlay "71" at 4913,2388 h40